# Altium PCB PCB.PcbDoc
Units mm, origin at the board's own origin, x right, y up, seen from the top; angles counter-clockwise.
Board outline 120 x 100 mm, 2 copper layers (Top Layer, Bottom Layer); 33 components, 31 nets, 148 pads, 4 vias.
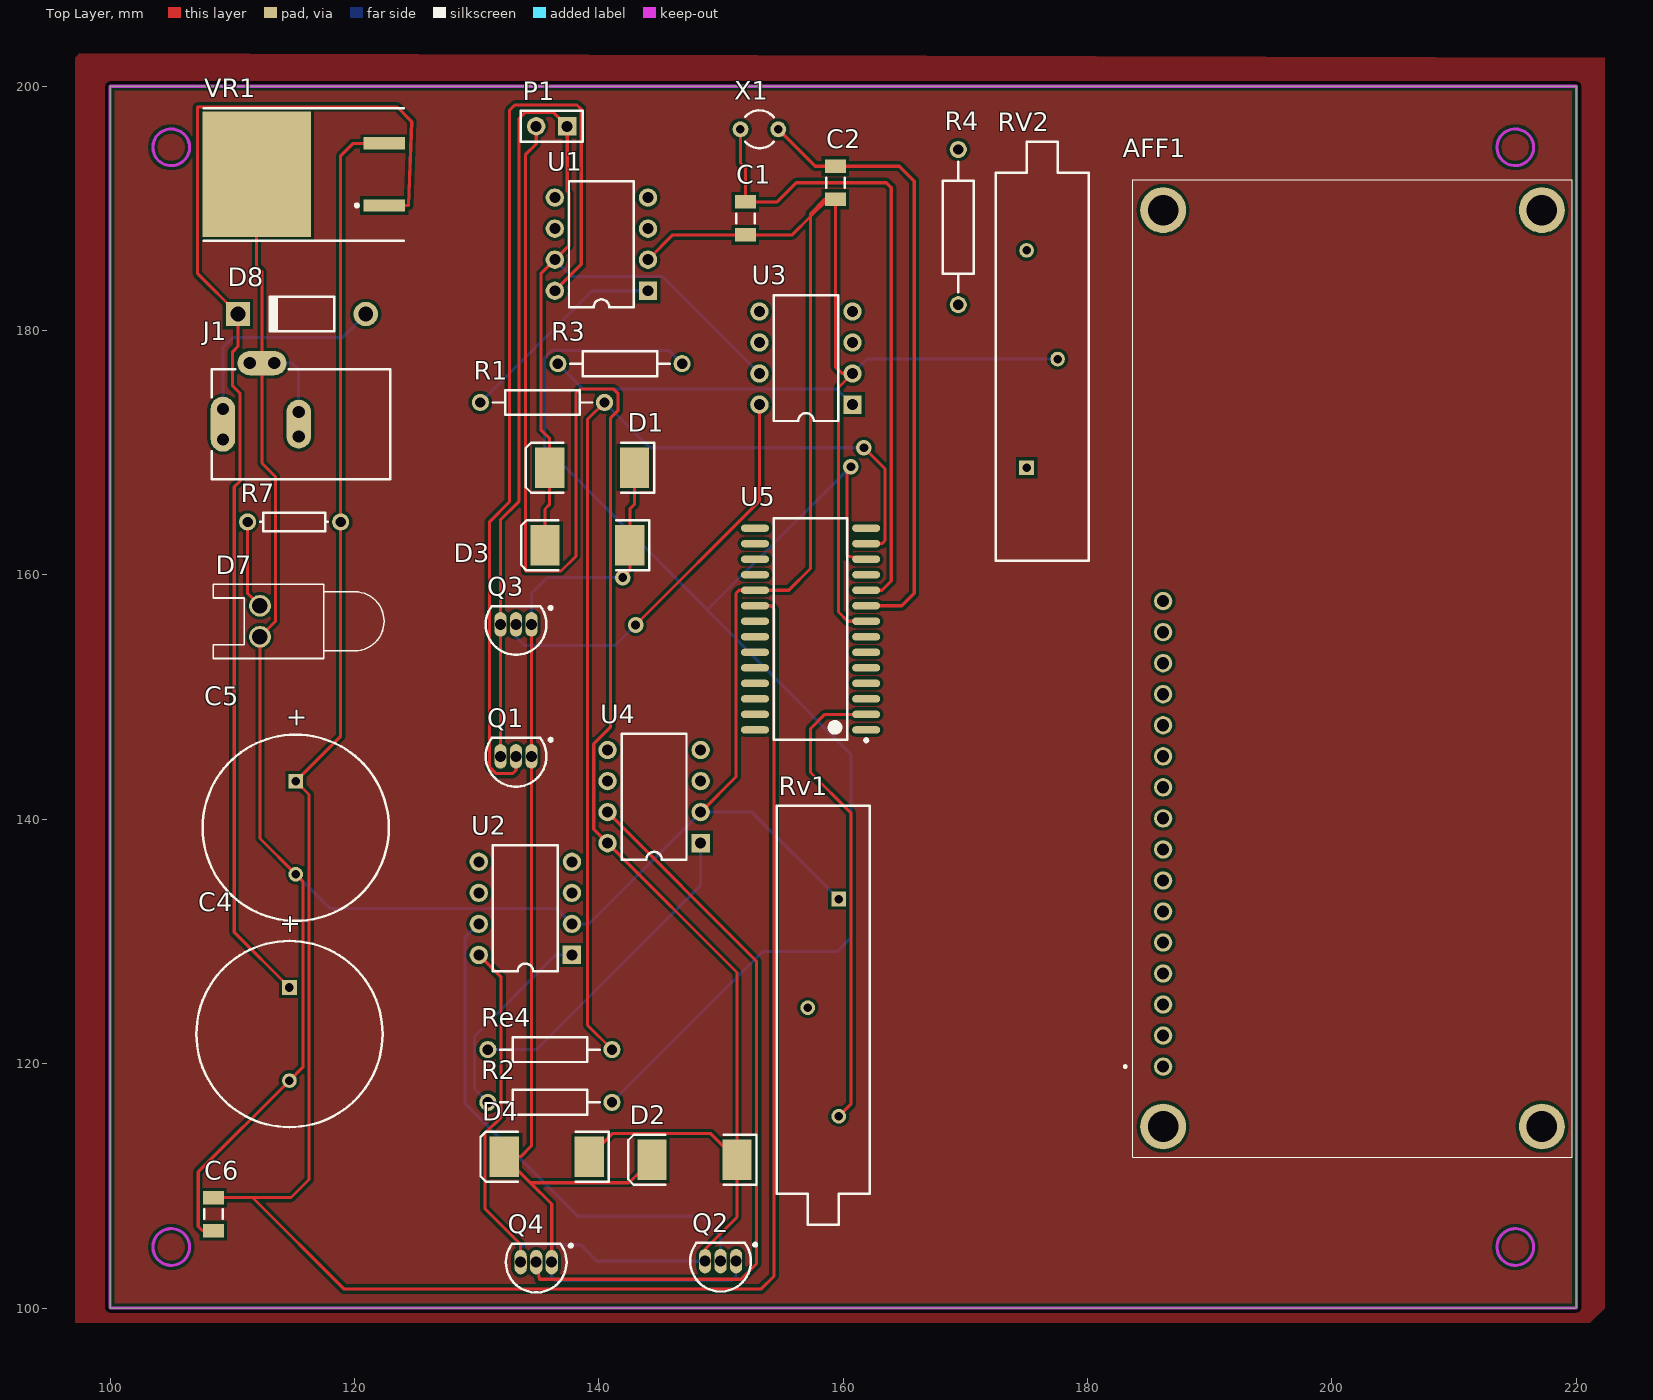
[diagram p0: Top Layer view]
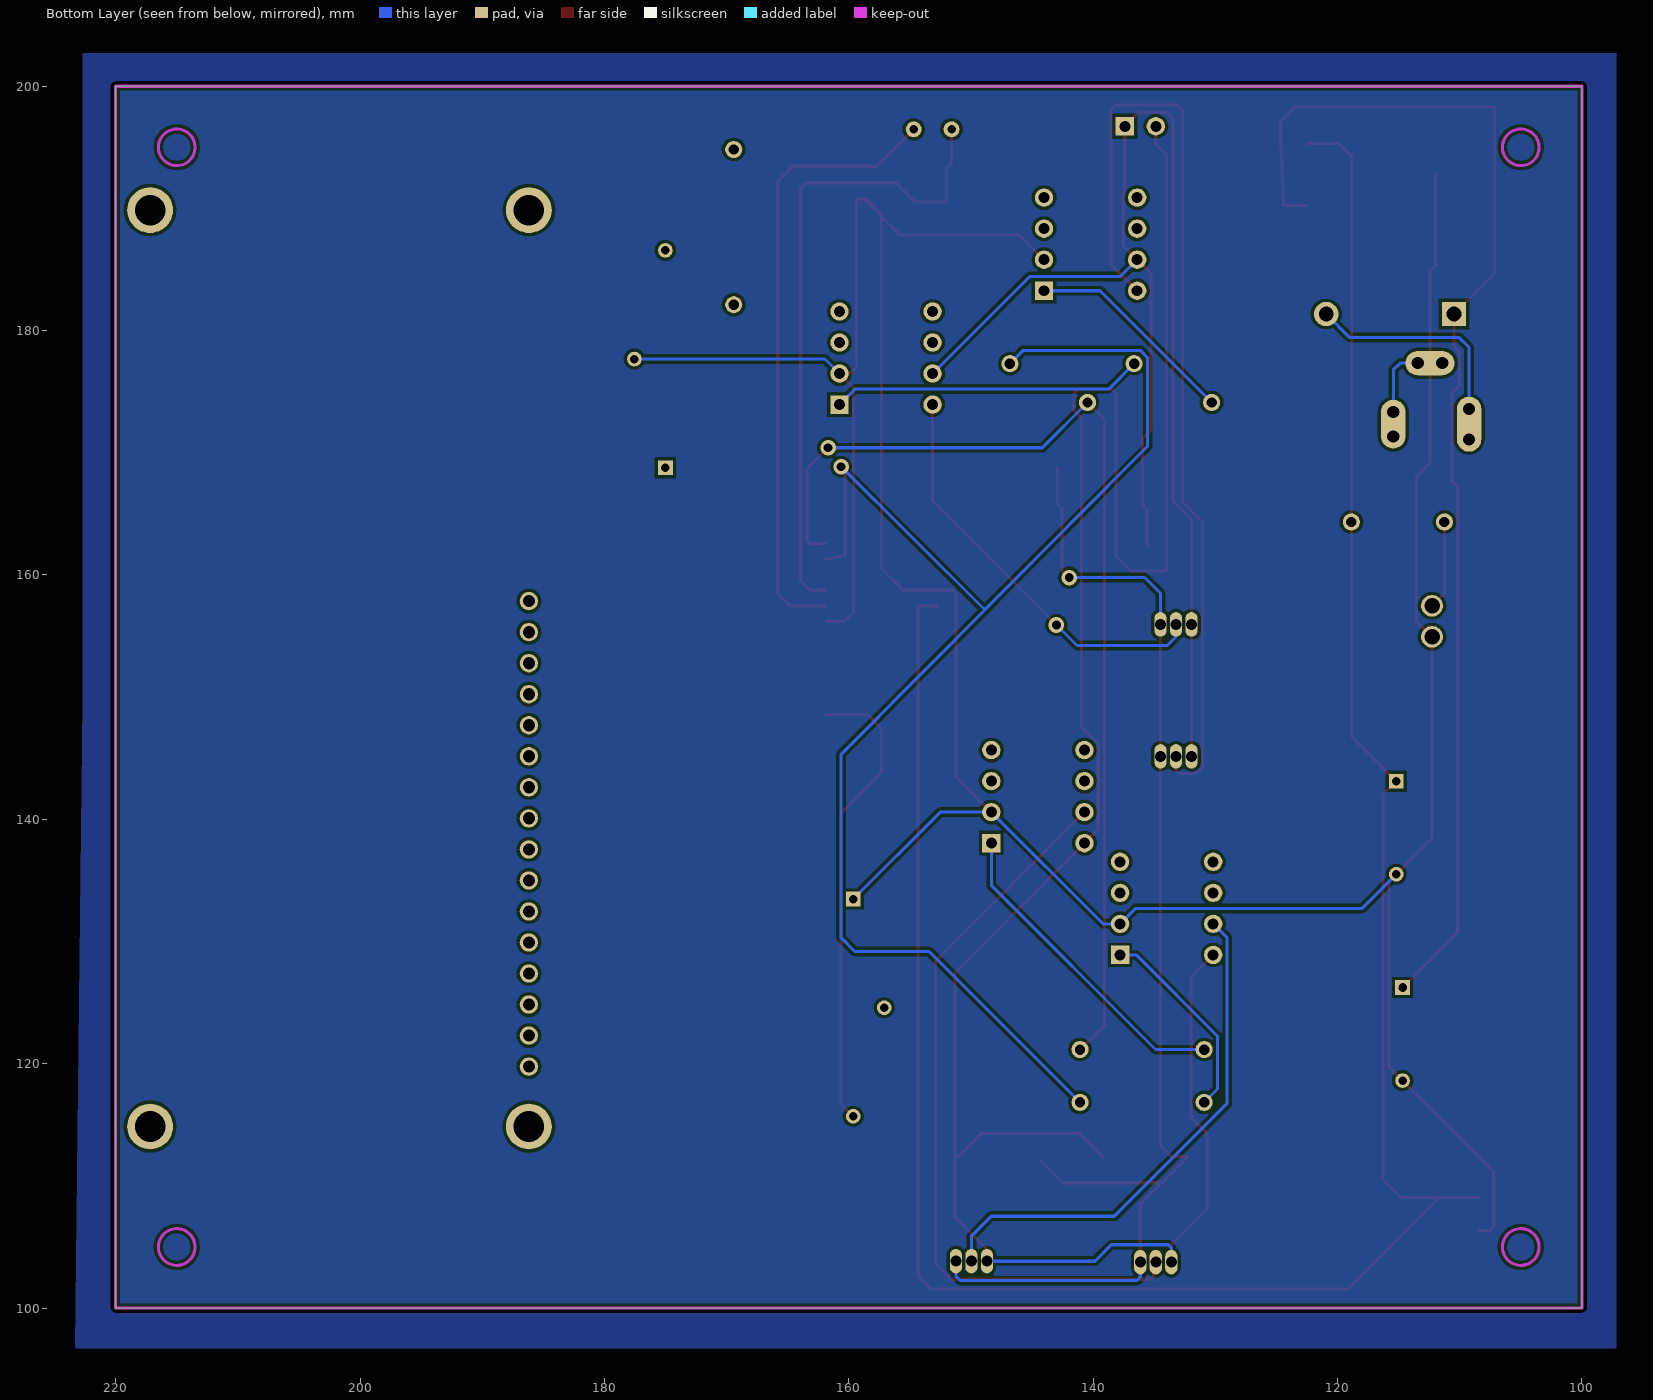
[diagram p1: Bottom Layer view, seen from below]

## Layer stack, top to bottom
Top Solder: solder mask 0.0102, Solder Resist, Dk 3.5
Top Layer: signal copper 0.0356
Dielectric 1: dielectric 0.32, FR-4, Dk 4.8
Bottom Layer: signal copper 0.0356
Bottom Solder: solder mask 0.0102, Solder Resist, Dk 3.5

## Board outline
100,100 220,100 220,200 100,200

## Design rules (kind name [scope] priority, off if disabled: settings)
Clearance [All] p1: gap=0.254
PolygonConnect [All] p1: connectstyle=Relief reliefconductorwidth=0.254 reliefentries=4 polygonreliefangle="90 Angle" airgapwidth=0.254
RoomDefinition U_power [InComponentClass('U_power')] p1: confinementstyle=ConfineIn formatcopy=TRUE lockcomponents=FALSE outline 125.857,104.14 125.857,199.517 106.045,199.517 106.045,104.14
RoomDefinition U_pic [InComponentClass('U_pic')] p2: confinementstyle=ConfineIn formatcopy=TRUE lockcomponents=FALSE outline 164.824,100.283 164.824,199.47 127.359,199.47 127.359,100.283
RoomDefinition U_Affi [InComponentClass('U_Affi')] p3: confinementstyle=ConfineIn formatcopy=TRUE lockcomponents=FALSE outline 167.894,111.76 219.71,111.76 219.71,198.374 167.894,198.374
RoutingVias [All] p1: holewidth=0.711 width=1.27 viastyle="Through Hole" minholewidth=0.711 minwidth=1.27 maxholewidth=0.711 maxwidth=1.27
SolderMaskExpansion [All] p1: expansion=0.102
Width [All] p1: maxlimit=0.254 minlimit=0.254 preferedwidth=0.254
30 further rules are at their usual default settings.

## Classes and differential pairs
component class U_power: C4 C5 C6 D7 D8 J1 R7 VR1
component class U_pic: C1 C2 D1 D2 D3 D4 P1 Q1 Q2 Q3 Q4 R1 R2 R3 Re4 Rv1 U1 U2 U3 U4 U5 X1
component class U_Affi: AFF1 R4 RV2

## Components (designator, comment, footprint, x,y, rotation, side; value= is the part's Value field where it differs from the comment)
AFF1 "LCD 16x2" LCRU01602DSFAWH 186.182,119.761 r90 top
C1 "Cap Semi" C1206 151.997,189.183 r90 top
C2 "Cap Semi" C1206 159.363,192.104 r90 top
C4 "Cap Pol1" RB7.6-15 114.681,122.428 r90 top
C5 "Cap Pol1" RB7.6-15 115.189,139.319 r90 top
C6 "Cap Semi" C1206 108.458,107.696 r90 top
D1 "Diode" SMC 139.446,168.783 r180 top
D2 "Diode" SMC 147.828,112.141 r180 top
D3 "Diode" SMC 139.065,162.433 r180 top
D4 "Diode" SMC 135.741,112.395 r180 top
D7 "LED0" LED-0 112.268,156.21 r90 top
D8 "Diode 1N4001" DO-41 115.697,181.356 r180 top
J1 "PWR2.5" KLD-0202 122.936,172.339 r180 top
P1 "Header 2" HDR1X2 137.414,196.723 r180 top
Q1 "2N3904" TO-92A 133.223,145.161 r90 top
Q2 "2N3906" TO-92A 149.965,103.839 r90 top
Q3 "2N3904" TO-92A 133.223,155.956 r90 top
Q4 "2N3906" TO-92A 134.874,103.759 r90 top
R1 "Res2" AXIAL-0.4 135.382,174.117 r180 top
R2 "Res2" AXIAL-0.4 135.995,116.84 r180 top
R3 "Res2" AXIAL-0.4 141.732,177.292 r180 top
R4 "Res Semi" AXIAL-0.5 169.418,188.468 r90 top
R7 "Res1" AXIAL-0.3 115.062,164.338 r180 top
Re4 "Res2" AXIAL-0.4 135.995,121.158 r180 top
Rv1 "Res Tap" VR3 158.369,124.587 r270 top
RV2 "Res Tap" VR3 176.276,177.673 r90 top
U1 "ILD74" DIP8 140.208,187.071 r90 top
U2 "ILD74" DIP8 133.985,132.715 r90 top
U3 "ILD74" DIP8 156.95,177.753 r90 top
U4 "ILD74" DIP8 144.526,141.859 r90 top
U5 "PIC16F876A-E/SO" SOIC-SO28_N 157.331,155.575 r180 top
VR1 "L7805ABD2T" TO-263 117.221,192.786 r90 top
X1 "XTAL" R38 153.14,196.469 r90 top

## Footprints (in the part's own frame and the unit in brackets; to place one, negate y for a bottom-side part, rotate by r counter-clockwise, add the part's x,y. Pads: shape width x height; smd on the part's side, far side on the other; paste and mask are expansions set on the pad)
AXIAL-0.3 [mm] "Axial Device, Thru-Hole; 2 Leads; 0.3 in Pin Spacing"
  round 1.4 hole 0.85: 1(-3.81,0) 2(3.81,0)
  silkscreen extent -2.77,-0.76 2.77,0.76
AXIAL-0.4 [mm] "Axial Device, Thru-Hole; 2 Leads; 0.4 in Pin Spacing"
  round 1.4 hole 0.85: 1(-5.08,0) 2(5.08,0)
  silkscreen extent -4.06,-1.02 4.06,1.02
AXIAL-0.5 [mm] "Axial Device, Thru-Hole; 2 Leads; 0.5 in Pin Spacing"
  round 1.4 hole 0.85: 1(-6.35,0) 2(6.35,0)
  silkscreen extent -5.33,-1.27 5.33,1.27
C1206 [mm] "Chip Capacitor, Body 3.2x1.6mm, IPC High Density"
  rect 1.1x1.7 smd: 1(-1.35,0) 2(1.35,0)
  silkscreen extent -0.4,-0.75 0.4,0.75, body extent -1.7,-0.9 1.7,0.9, height 1.3
DIP8 [mm] "DIP; 8 Leads; Row Spacing 7.62 mm; Pitch 2.54 mm"
  rect 1.5x1.5 hole 0.9: 1(-3.81,-3.81)
  round 1.5 hole 0.9: 2(-1.27,-3.81) 3(1.27,-3.81) 4(3.81,-3.81) 5(3.81,3.81) 6(1.27,3.81) 7(-1.27,3.81) 8(-3.81,3.81)
  silkscreen extent -5.15,-2.65 5.15,2.65
DO-41 [mm] "Diode, Axial; Body 5.2 x 2.7 mm (LxDia. max), Lead Dia. 0.86 mm (max)"
  round 2 hole 1.2: 1(-5.23,0)
  rect 2x2 hole 1.2: 2(5.23,0)
  silkscreen extent -2.65,-1.4 2.75,1.4
HDR1X2 [mm] "Connector; Header; 2 Position"
  rect 1.5x1.5 hole 0.9: 1(0,0)
  round 1.5 hole 0.9: 2(2.54,0)
  silkscreen extent -1.27,-1.27 3.81,1.27
KLD-0202 [mm] "DC Power Jack, 2.5mm, KLD Series, PCB Mount"
  oval 2x4.5 all layers, no hole: 1(13.7,0)
  round 1.5 hole 1: 1A(13.7,-1.25) 1B(13.7,1.25) 2A(7.5,-1) 2B(7.5,1) 3A(9.5,-5) 3B(11.5,-5)
  oval 2x4 all layers, no hole: 2(7.5,0)
  oval 4x2 all layers, no hole: 3(10.5,-5)
  silkscreen extent 0,-4.5 14.6,4.5
LCRU01602DSFAWH [mm]
  round 1.5 hole 1: 1(0,0) 2(2.54,0) 3(5.08,0) 4(7.62,0) 5(10.16,0) 6(12.7,0) 7(15.24,0) 8(17.78,0) 9(20.32,0) 10(22.86,0) 11(25.4,0) 12(27.94,0) 13(30.48,0) 14(33.02,0) 15(35.56,0) 16(38.1,0)
  round 3.75 hole 2.5: MH1(-4.9,0) MH2(-4.9,-31) MH3(70.1,-31) MH4(70.1,0)
  silkscreen extent -7.4,-33.5 72.6,3.2, body extent -10,-3.38 10,3.38, height 5.8
LED-0 [mil] "LED; 2 Leads"
  round 70 hole 50: 1(50,0) 2(-50,0)
  silkscreen extent -120,-400 120,150
R38 [mm] "Crystal, Thru-Hole; 2 Leads; Body 3.1 x 8.2 mm (Dia.xH)"
  round 1.3 hole 0.7: 1(0,1.55) 2(0,-1.55)
  silkscreen extent -1.55,-1.19 1.55,1.17
RB7.6-15 [mm] "Polarized Capacitor (Radial); 2 Leads"
  rect 1.2x1.2 hole 0.7: 1(3.81,0)
  round 1.2 hole 0.7: 2(-3.81,0)
  silkscreen extent -7.62,-7.62 7.62,7.62
SMC [mm] "DO-214-AB/SMC; 2 C-Bend Leads; Body 7.9 x 5.9 mm, inc. leads (LxW)"
  rect 2.4x3.3 smd: 1(-3.475,0) 2(3.475,0)
  silkscreen extent -5.08,-2.05 5.42,2.06
SOIC-SO28_N [mm] "SOIC, 28-Leads, Body 17.9x7.5mm, Pitch 1.27mm, IPC Medium Density"
  oval 2.3x0.6 smd: 1(-4.55,8.255) 2(-4.55,6.985) 3(-4.55,5.715) 4(-4.55,4.445) 5(-4.55,3.175) 6(-4.55,1.905) 7(-4.55,0.635) 8(-4.55,-0.635) 9(-4.55,-1.905) 10(-4.55,-3.175) 11(-4.55,-4.445) 12(-4.55,-5.715) 13(-4.55,-6.985) 14(-4.55,-8.255) 15(4.55,-8.255) 16(4.55,-6.985) 17(4.55,-5.715) 18(4.55,-4.445) 19(4.55,-3.175) 20(4.55,-1.905) 21(4.55,-0.635) 22(4.55,0.635) 23(4.55,1.905) 24(4.55,3.175) 25(4.55,4.445) 26(4.55,5.715) 27(4.55,6.985) 28(4.55,8.255)
  silkscreen extent -4.67,-9.05 3,9.23, body extent -3.8,-9.06 3.8,9.06, height 2.65
TO-92A [mm] "TO, Flat Index; 3 In-Line, Axial Leads; Body Dia. 4.5mm; Leads 0.51 x 0.48 mm (max)"
  oval 2x1 hole 0.9: 1(0,-1.27) 2(0,0) 3(0,1.27)
  silkscreen extent -2.48,-2.96 1.5,2.48, body extent -2.48,-2.5 1.5,2.5, height 6.86
TO-263 [mm] "D2-PAK/TO-263-AB; 3 Leads (1 Cropped); Body 15.9 (inc. leads) x 10.4 mm (LxW max)"
  rect 1x3.4 smd: 1(-2.54,-5.225) 3(2.54,-5.225)
  rect 10.25x8.9 smd: 4(0,5.225)
  silkscreen extent -5.42,-6.82 5.42,9.57
VR3 [mm] "Thru-Hole; 3 Leads"
  rect 1.2x1.2 hole 0.7: 1(-8.89,1.27)
  round 1.2 hole 0.7: 2(0,-1.27) 3(8.89,1.27)
  silkscreen extent -16.51,-3.81 17.78,3.81

## Part data
C1 C2 C6: "Capacitor (Semiconductor SIM Model)"
C4 C5: "Polarized Capacitor (Radial)"
D1 D2 D3 D4: "Default Diode"
D7: "Typical INFRARED GaAs LED"
D8: "1 Amp General Purpose Rectifier"
J1: "Low Voltage Power Supply Connector"
P1: "Header, 2-Pin"
Q1 Q3: "NPN General Purpose Amplifier"
Q2 Q4: "PNP General Purpose Amplifier"
R1 R2 R3 R7 Re4: "Resistor"
R4: "Semiconductor Resistor"
Rv1 RV2: "Tapped Resistor"
U1 U2 U3 U4: "Optocoupler, Phototransistor Output, Dual Channel, TTL Compatible, Pb-free"
U5: "Enhanced FLASH Microcontroller, 8K (x14-Bit words) FLASH, 368 Bytes RAM, 28-Pin SOIC, Standard VDD Range, Extended Temperature"
VR1: "Precision 1A Regulator"
X1: "Crystal Oscillator"

## Via types
v1: diameter 1.27, hole 0.711, Top Layer to Bottom Layer, 4 vias

## Nets (pads, with @x,y where several pads share a name; then routed paths per layer and width w, separated by ;. In a path a pad name is that pad's centre, name@x,y a point inside that pad or via, vN(x,y) a via of type N, cw(c..) or ccw(c..) an arc to the next point about the centre after c; other vN are vias at no path point)
3V: R4.1
5V: C5.1 C6.2 R7.1 U5.20 VR1.3 | length 200.7
  Top Layer w0.254: C6.2 111.658,109.046 ; VR1.3 119.888,195.326 118.872,194.31 R7.1 118.872,146.812 C5.1 116.281,142.037 116.281,110.519 114.808,109.046 111.658,109.046 ; U5.20 154.076,157.48 154.33,157.226 154.33,102.616 153.264,101.549 119.155,101.549 111.658,109.046
12V: D8.1 J1.1 J1.1A J1.1B | length 21.6
  Top Layer w0.254: J1.1B J1.1 J1.1A
  Bottom Layer w0.254: J1.1 J1.1A 109.236,178.629 110.033,179.426 118.997,179.426 D8.1
AM+: D1.2 D3.2 P1.1 Q1.3 Q3.3 U1.7 U3.7 | length 113.8
  Top Layer w0.254: Q1.3 Q3.3 131.953,164.516 133.477,166.04 133.477,197.358 133.985,197.866 136.271,197.866 P1.1 137.414,191.389 137.541,191.262 137.541,186.944 U1.7 135.255,184.658 135.255,171.887 135.971,171.171 D1.2 135.971,165.786 135.59,165.405 D3.2
  Bottom Layer w0.254: U1.7 137.77,184.429 145.194,184.429 U3.7
AM-: D2.1 D4.1 P1.2 Q2.3 Q4.3 U2.8 U4.8 | length 194.6
  Top Layer w0.254: U2.8 132.004,127.076 132.004,115.621 130.683,114.3 130.683,108.128 133.604,105.207 Q4.3 ; P1.2 134.874,195.275 133.985,194.386 133.985,160.325 136.906,160.325 138.125,161.544 138.125,174.879 138.455,175.209 141.224,175.209 141.554,174.879 141.554,173.431 140.945,172.822 140.945,147.537 139.585,146.177 139.585,139.18 U4.8 151.303,127.462 D2.1 ; D4.1 141.096,114.275 149.169,114.275 D2.1 ; Q2.3 148.695,104.834 151.303,107.442 D2.1
  Bottom Layer w0.254: Q4.3 133.604,104.927 133.858,105.181 138.506,105.181 139.852,103.835 148.695,103.835 Q2.3
GND: C1.1 C2.1 C4.2 C5.2 C6.1 D7.2 J1.2 J1.2A J1.2B J1.3 J1.3A J1.3B Rv1.1 RV2.2 U1.2 U2.2 U3.2 U4.2 U5.8 U5.19 VR1.4 | length 286.8
  Top Layer w0.254: C6.1 107.547,106.346 107.213,106.68 107.213,111.15 C4.2 115.773,119.71 115.773,134.925 C5.2 112.268,138.43 D7.2 113.538,156.21 113.538,168.046 112.436,169.148 J1.3 112.436,184.836 111.996,185.276 VR1.4 ; J1.2B J1.2 J1.2A ; U1.2 146.05,187.833 C1.1 155.829,187.833 157.328,189.332 ; U4.2 151.232,143.485 151.232,158.496 151.486,158.75 U5.19 155.55,158.75 157.328,160.528 157.328,189.332 ; C2.1 C2.1@159.36,190.754 ; U5.8 160.376,156.21 159.614,156.972 159.614,175.337 U3.2 159.915,176.483 159.36,177.038 C2.1@159.36,190.754 ; 157.328,189.332 157.328,189.586 158.496,190.754 C2.1@158.75,190.754 ; 157.328,189.332 C2.1@158.75,190.754 ; C2.1@158.75,190.754 C2.1@159.36,190.754
  Bottom Layer w0.254: J1.3B J1.3 112.899,177.339 J1.3A 114.881,177.339 115.436,176.784 J1.2A J1.2 ; C5.2 117.983,132.715 136.525,132.715 U2.2 139.192,131.445 U4.2 152.527,140.589 Rv1.1 ; U3.2 161.95,177.673 RV2.2
NetC4_1: C4.1 D8.2 VR1.1 | length 102.8
  Top Layer w0.254: C4.1 110.16,130.759 110.16,167.208 110.642,167.691 110.642,174.854 110.033,175.463 110.033,178.28 110.467,178.714 D8.2 107.163,184.66 107.163,198.298 123.495,198.298 124.689,197.104 124.435,190.246 VR1.1
NetD1_1: D1.1 D2.2 D3.1 D4.2 Q1.1 Q2.1 Q3.1 Q4.1 | length 104
  Top Layer w0.254: Q3.1 Q1.1 134.493,113.284 133.604,112.395 D4.2 134.4,110.261 ; Q4.1 136.144,108.517 134.4,110.261 ; v1(141.961,159.791) 142.54,160.371 D3.1 142.54,165.405 142.921,165.786 D1.1 ; D2.2 142.473,110.261 134.4,110.261
  Bottom Layer w0.254: Q3.1 134.493,158.496 135.788,159.791 v1(141.961,159.791) ; Q4.1 136.144,102.514 136.398,102.26 150.879,102.26 151.235,102.616 Q2.1
NetD7_1: D7.1 R7.2 | length 7.3
  Top Layer w0.254: R7.2 111.252,158.496 D7.1
NetQ1_2: Q1.2 U1.8 | length 80
  Top Layer w0.254: Q1.2 133.223,144.018 132.969,143.764 131.572,143.764 131.064,144.272 131.064,164.363 132.69,165.989 132.69,198.025 133.131,198.466 138.211,198.466 138.557,198.12 138.557,185.42 U1.8
NetQ2_2: Q2.2 U2.7 | length 42.6
  Bottom Layer w0.254: U2.7 129.032,130.302 129.032,116.764 138.278,107.518 148.336,107.518 149.965,105.889 Q2.2
NetQ3_2: Q3.2 U3.8 | length 34
  Top Layer w0.254: v1(143.002,155.905) 153.14,166.043 U3.8
  Bottom Layer w0.254: Q3.2 133.223,154.94 133.934,154.229 141.326,154.229 v1(143.002,155.905)
NetQ4_2: Q4.2 U4.7 | length 61.7
  Top Layer w0.254: Q4.2 135.128,102.362 151.638,102.362 152.908,103.632 152.908,128.397 U4.7
NetR1_2: R1.2 U1.1 | length 17.5
  Bottom Layer w0.254: R1.2 139.446,183.261 U1.1
NetR2_2: R2.2 U2.1 | length 16.6
  Bottom Layer w0.254: R2.2 129.819,117.936 129.819,122.25 136.474,128.905 U2.1
NetR3_2: R3.2 U3.1 | length 25.5
  Bottom Layer w0.254: R3.2 138.735,175.209 159.494,175.209 U3.1
NetRe4_2: Re4.2 U4.1 | length 26.4
  Bottom Layer w0.254: Re4.2 134.899,121.158 148.336,134.595 U4.1
NetRv1_3: Rv1.3 U5.2 | length 38.5
  Top Layer w0.254: Rv1.3 160.63,116.688 160.63,140.538 157.328,143.84 157.328,147.422 158.496,148.59 U5.2
OSC1: C2.2 U5.9 X1.2 | length 51
  Top Layer w0.254: X1.2 157.705,193.454 C2.2 164.592,193.454 165.811,192.235 165.811,158.496 164.795,157.48 U5.9
OSC2: C1.2 U5.10 X1.1 | length 53.4
  Top Layer w0.254: X1.1 151.59,193.701 151.997,193.294 C1.2 154.592,190.533 156.159,192.1 163.525,192.1 163.932,191.694 163.932,159.512 163.17,158.75 U5.10
PWM1: R1.1 Re4.1 U5.13 | length 87.1
  Top Layer w0.254: R1.1 139.077,172.732 139.077,123.156 Re4.1 ; v1(161.696,170.409) 163.424,168.681 163.424,162.814 163.17,162.56 U5.13
  Bottom Layer w0.254: R1.1 144.17,170.409 v1(161.696,170.409)
PWM2: R2.1 R3.1 U5.12 | length 139.4
  Top Layer w0.254: v1(160.63,168.859) 160.325,168.554 160.325,161.544 U5.12
  Bottom Layer w0.254: R2.1 153.419,129.184 159.512,129.184 160.63,130.302 160.63,145.339 135.56,170.51 ; R3.1 145.72,178.384 136.144,178.384 135.56,177.8 135.56,170.51 ; v1(160.63,168.859) 148.893,157.177 135.56,170.51
RB0: U5.21
RB1: U5.22
RB2: U5.23
RD4: U5.24
RD5: U5.25
RD6: U5.26
RD7: U5.27
VCC: RV2.1
VEE: RV2.3
pads on no net: AFF1.1 AFF1.2 AFF1.3 AFF1.4 AFF1.5 AFF1.6 AFF1.7 AFF1.8 AFF1.9 AFF1.10 AFF1.11 AFF1.12 AFF1.13 AFF1.14 AFF1.15 AFF1.16 AFF1.MH1 AFF1.MH2 AFF1.MH3 AFF1.MH4 R4.2 Rv1.2 U1.3 U1.4 U1.5 U1.6 U2.3 U2.4 U2.5 U2.6 U3.3 U3.4 U3.5 U3.6 U4.3 U4.4 U4.5 U4.6 U5.1 U5.3 U5.4 U5.5 U5.6 U5.7 U5.11 U5.14 U5.15 U5.16 U5.17 U5.18 U5.28

## Polygon pours and split planes (outlines as drawn)
no net on Top Layer "NONET_L01_P020" (solid, pour order 20): 222.311,202.311 222.311,100 221.117,98.806 223.505,98.806 97.155,98.806 97.155,202.311 97.536,202.692
GND on Top Layer "GND_L01_P008" (solid, pour order 8): 113.03,177.292 113.792,178.054 113.792,178.308
no net on Bottom Layer "NONET_L02_P028" (solid, pour order 28): 222.692,202.692 222.692,149.606 223.302,96.698 97.196,96.698 97.196,202.692

## Keep-outs
Keep-Out Layer:
  circle w0.254: c105,105 r1.5
  circle w0.254: c215,105 r1.5
  circle w0.254: c215,195 r1.5
  circle w0.254: c105,195 r1.5
  lines w0.254: 100,100 220,100 220,200 100,200 100,100

## Text inside footprints (layer, text, board x,y; h text height)
C4: Top Overlay "+" at 115.418,130.56 h1.5 r90
C5: Top Overlay "+" at 115.926,147.451 h1.5 r90
J1: Mechanical 1 "Mech 2 - Clearance, move to internal plane if present" at 122.65,167.273 h0.3 r180; Mechanical 1 "Mech 1 - Slot cut-out" at 122.65,166.773 h0.3 r180; Mechanical 1 "Assign keep-out area to slot" at 122.65,165.773 h0.3 r180; Mechanical 1 "Alert PCB fab to slot details" at 122.65,166.273 h0.3 r180